# Altium PCB TMC2590_BOB40_V1_0.PcbDoc
Units mil, origin at the board's own origin, x right, y up, seen from the top; angles counter-clockwise.
Board outline 1500 x 1200 mil, 4 copper layers (Top, GND, VM, Bottom), stack 63.504 mil thick; 32 components, 34 nets, 115 pads, 154 vias.
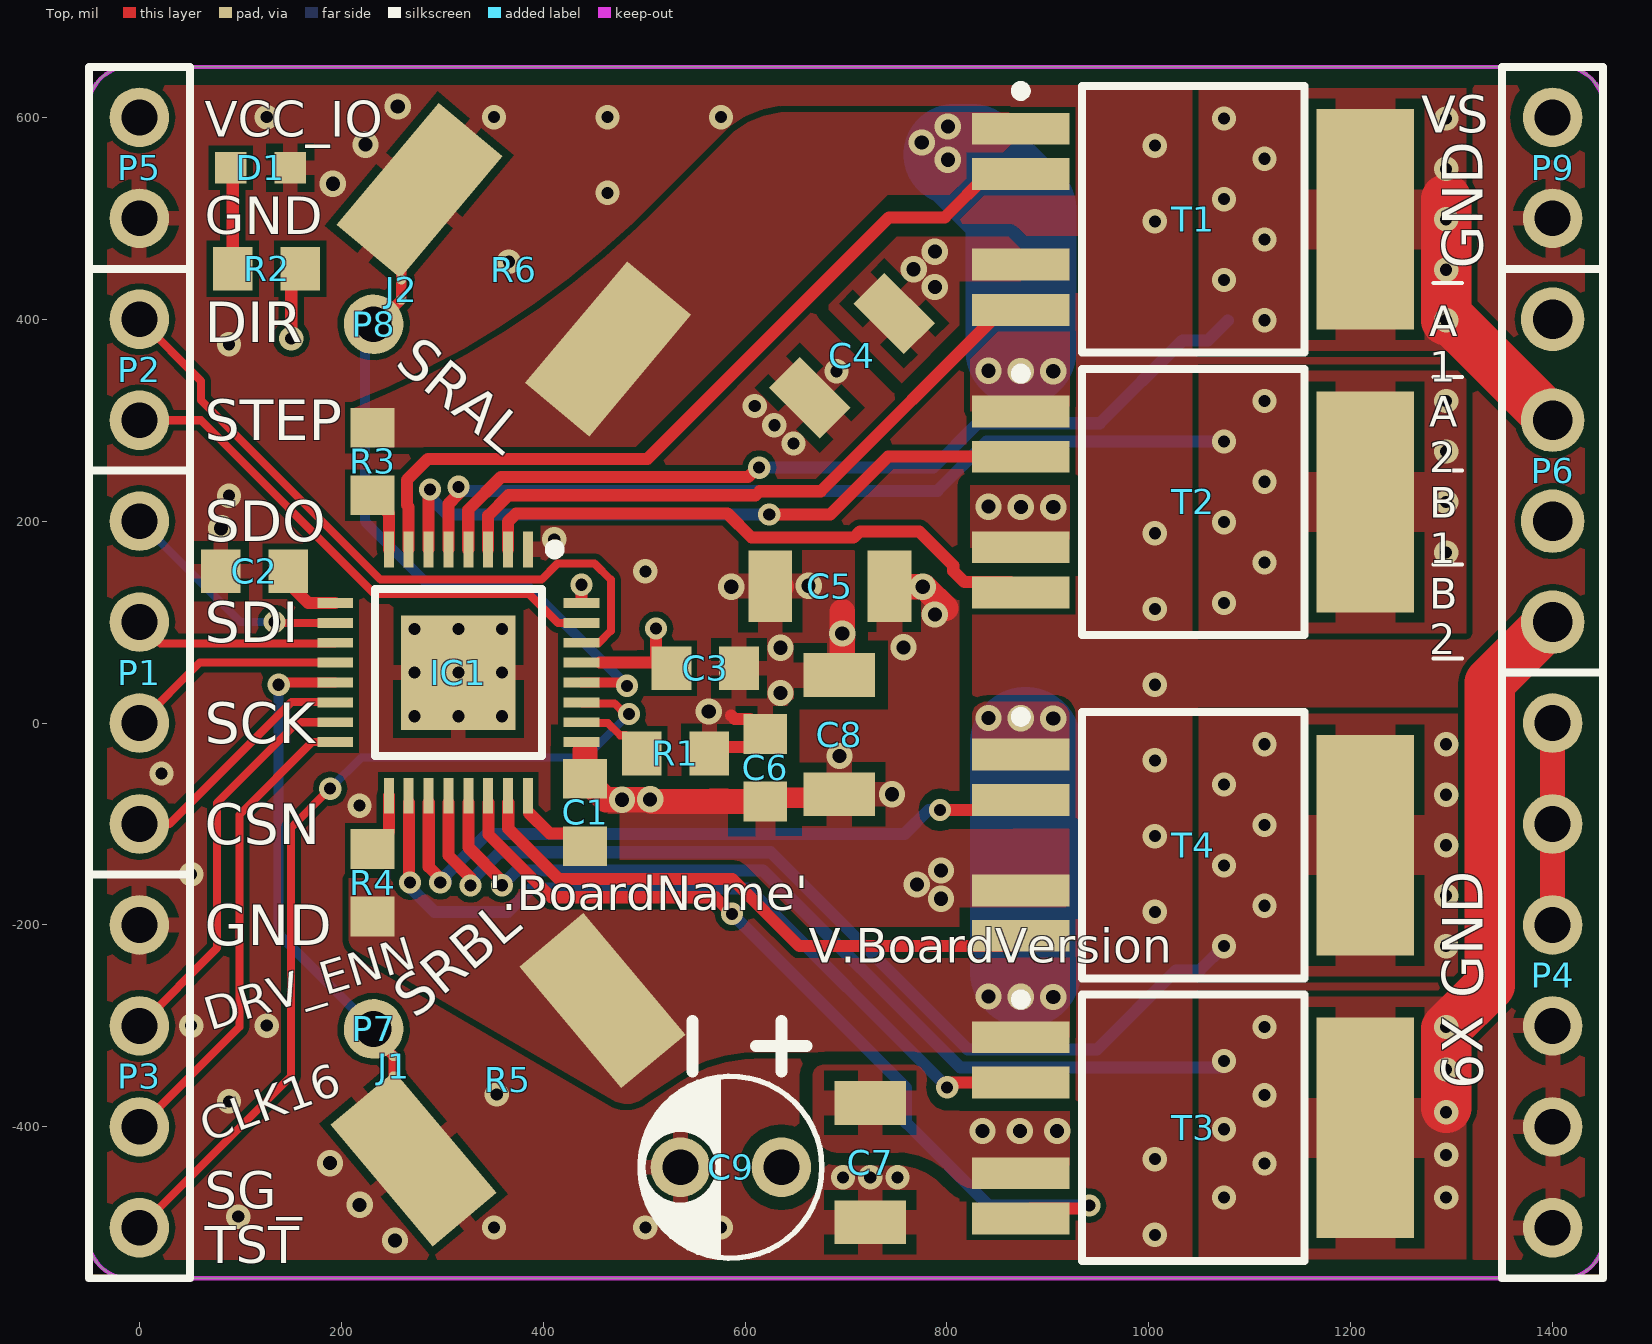
[diagram p0: Top view]
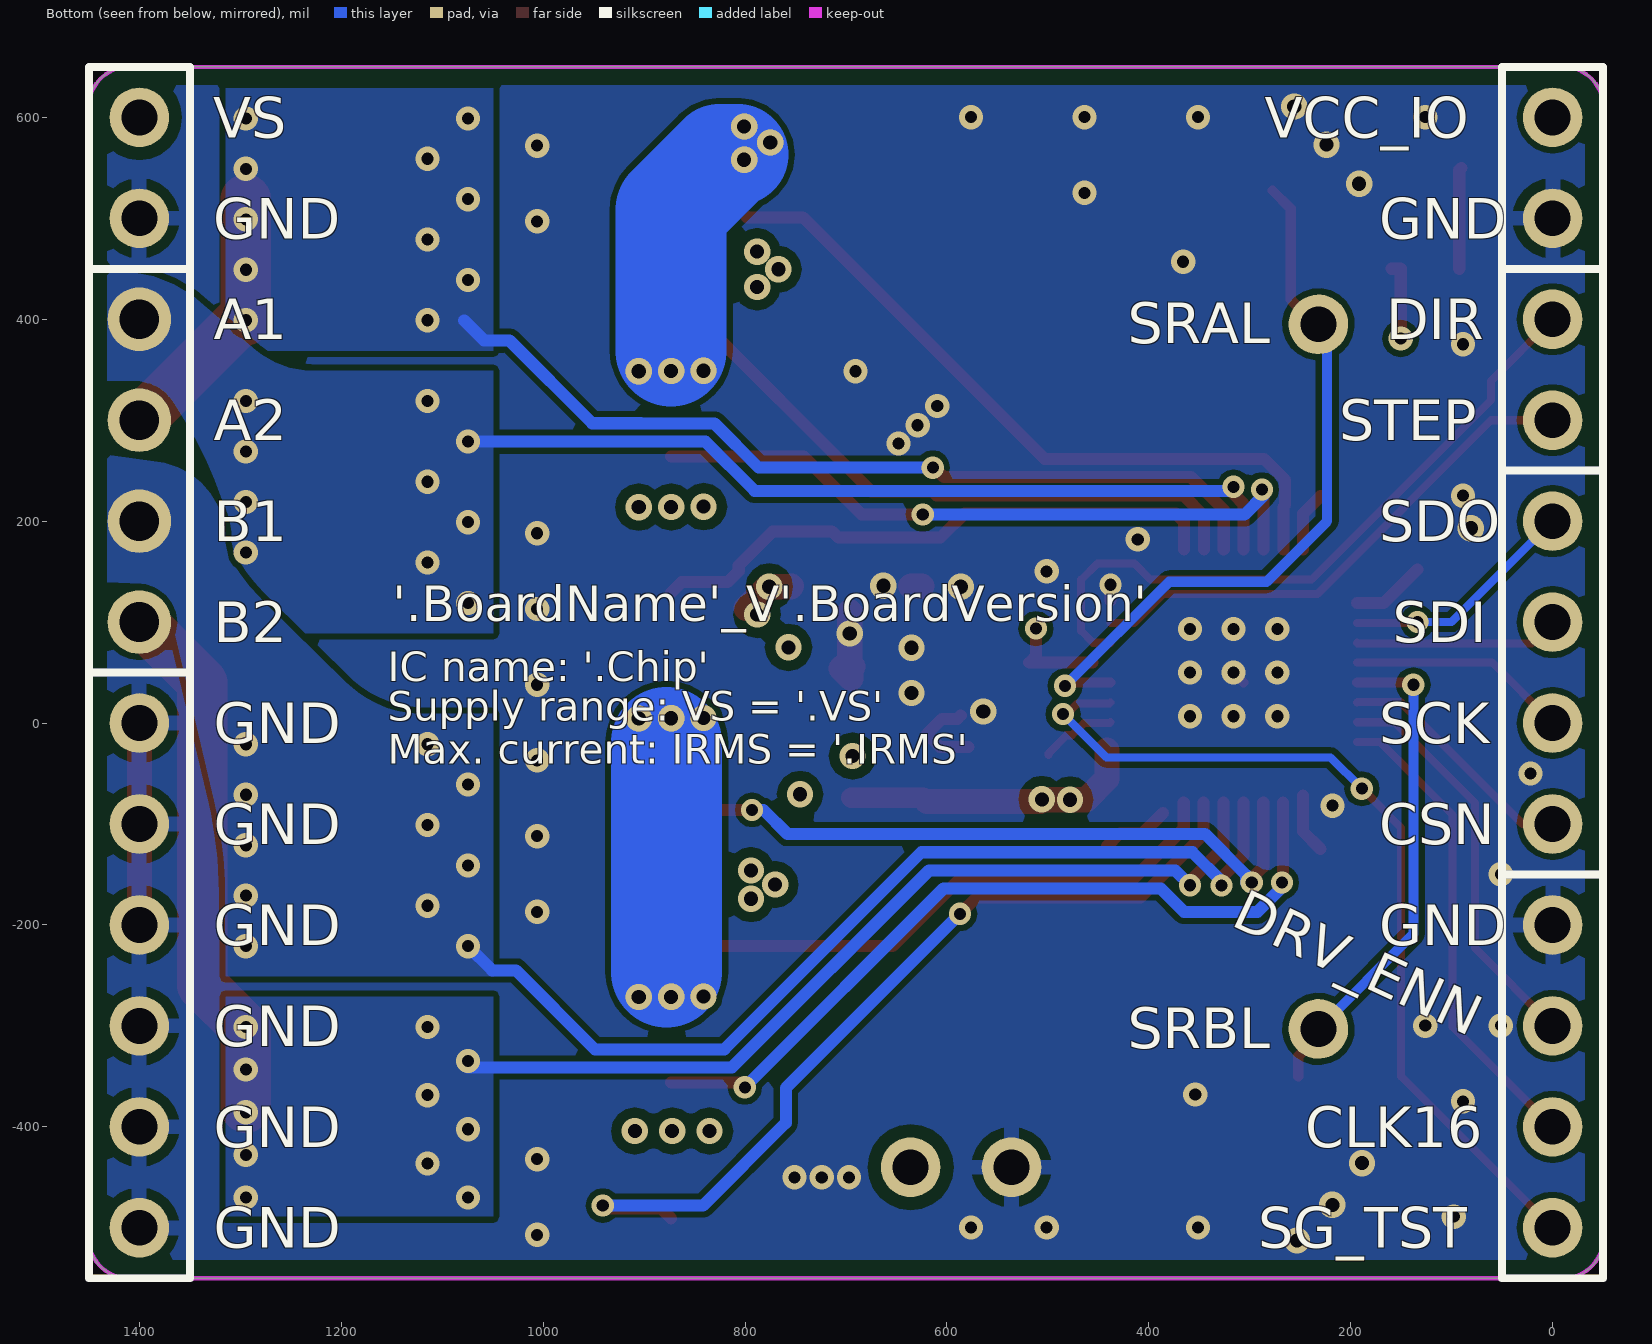
[diagram p1: Bottom view, seen from below]
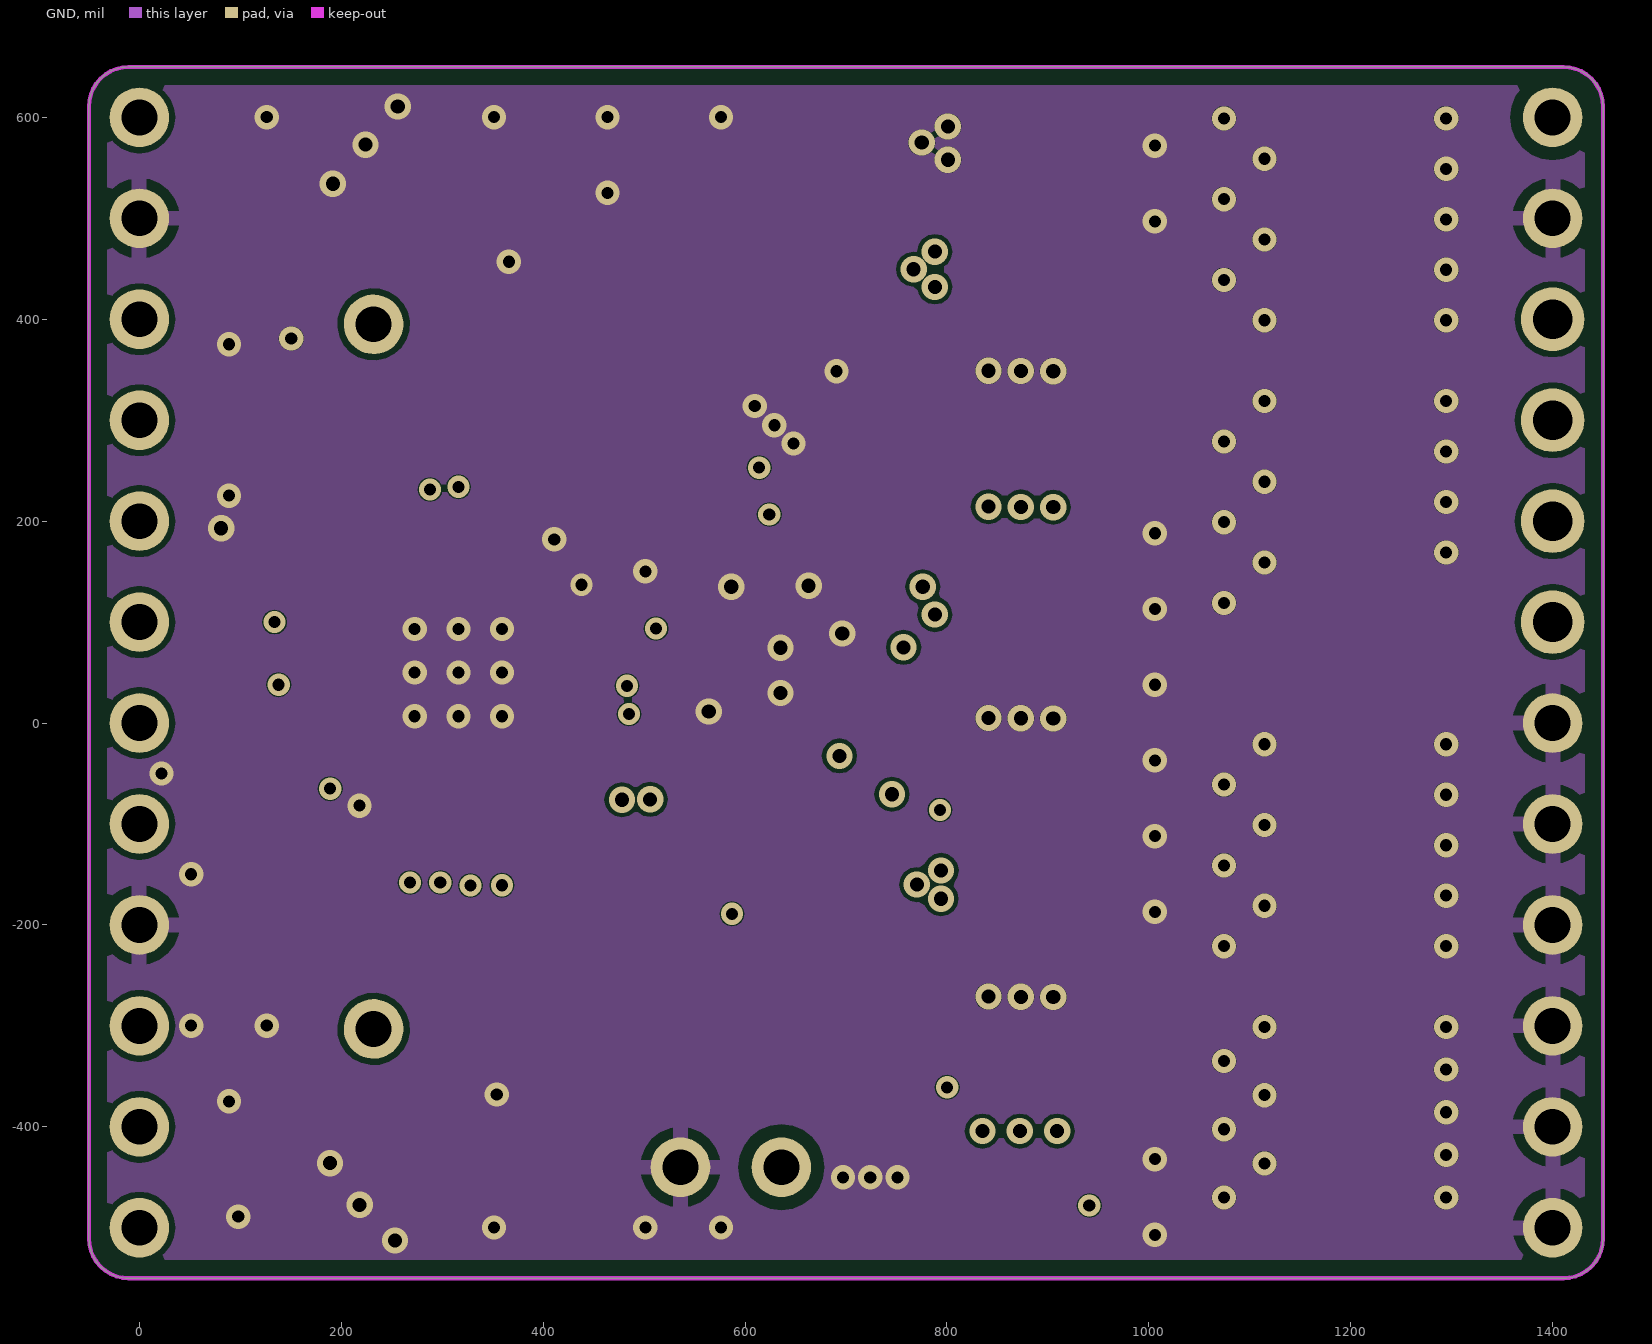
[diagram p2: GND]
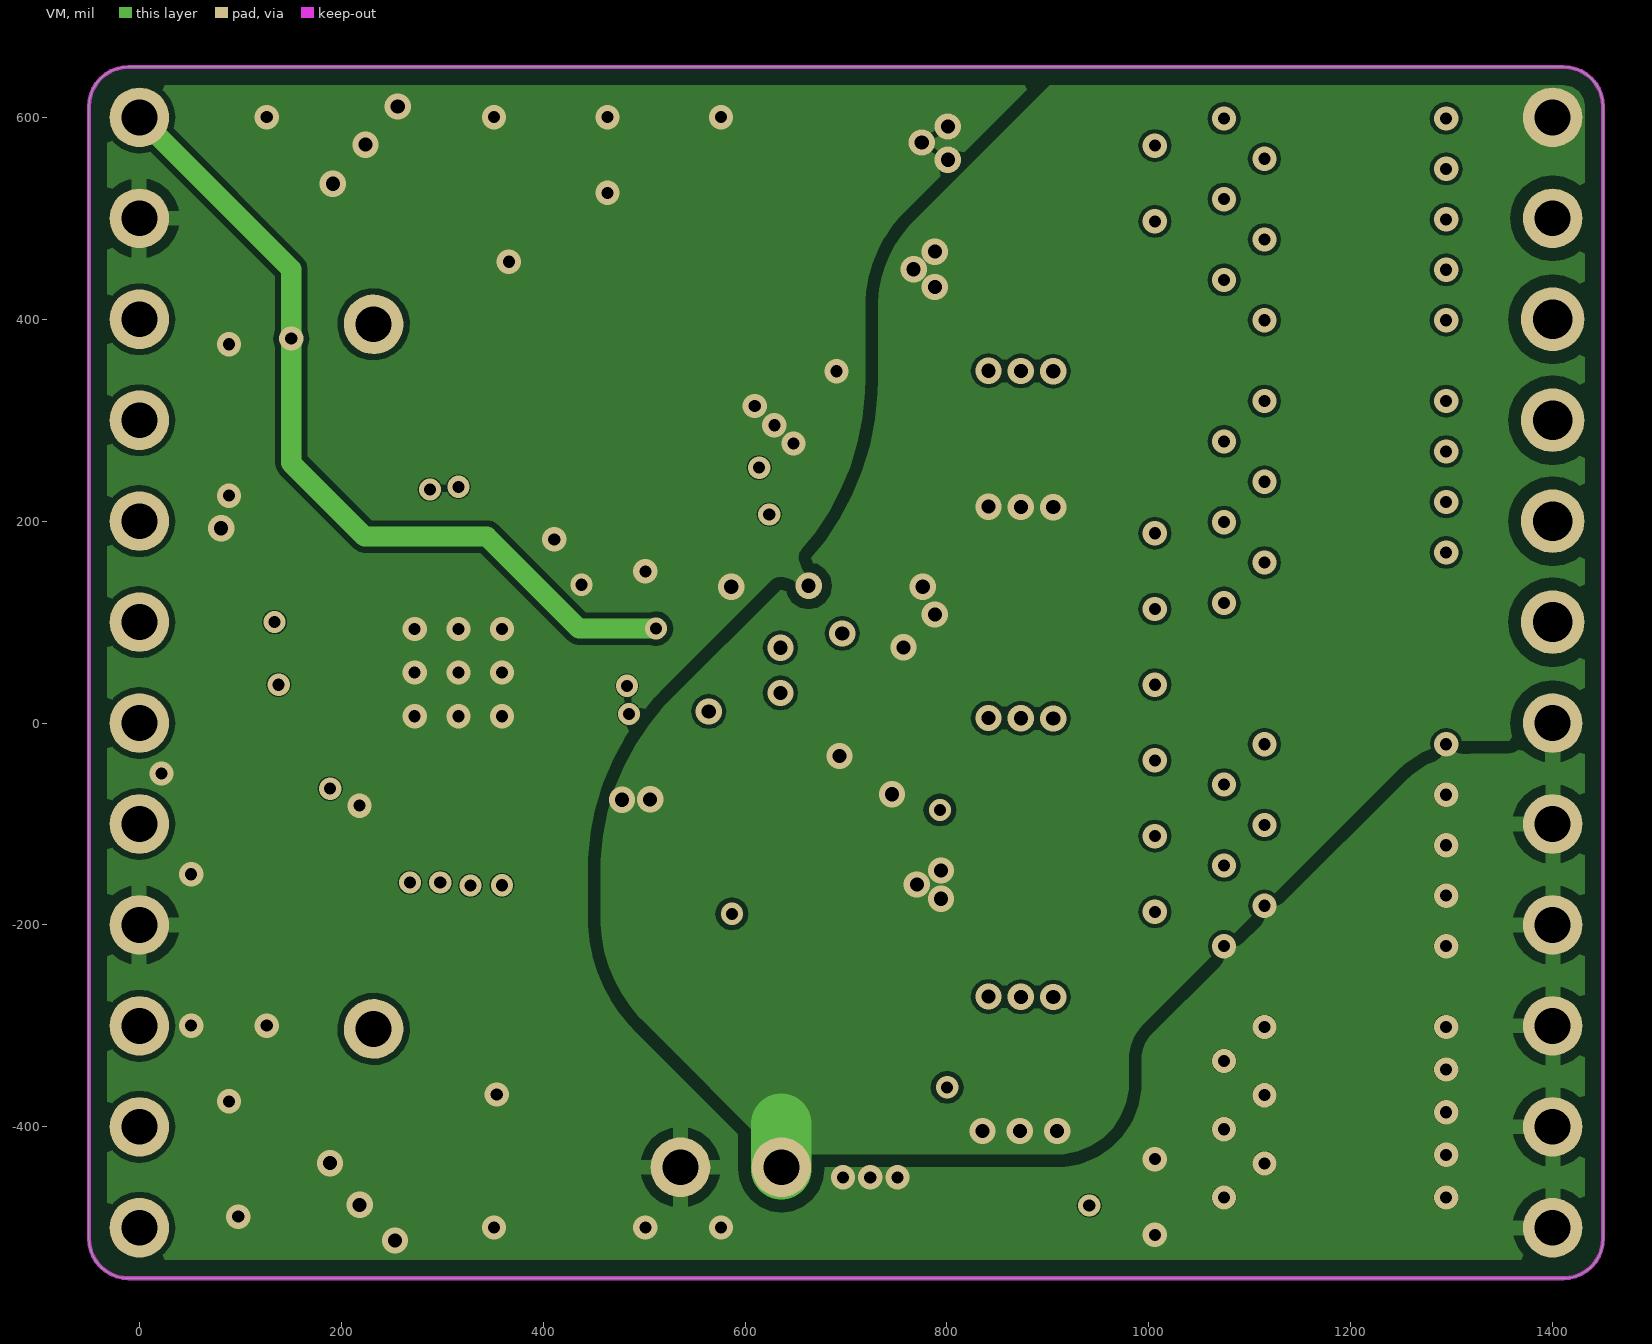
[diagram p3: VM]
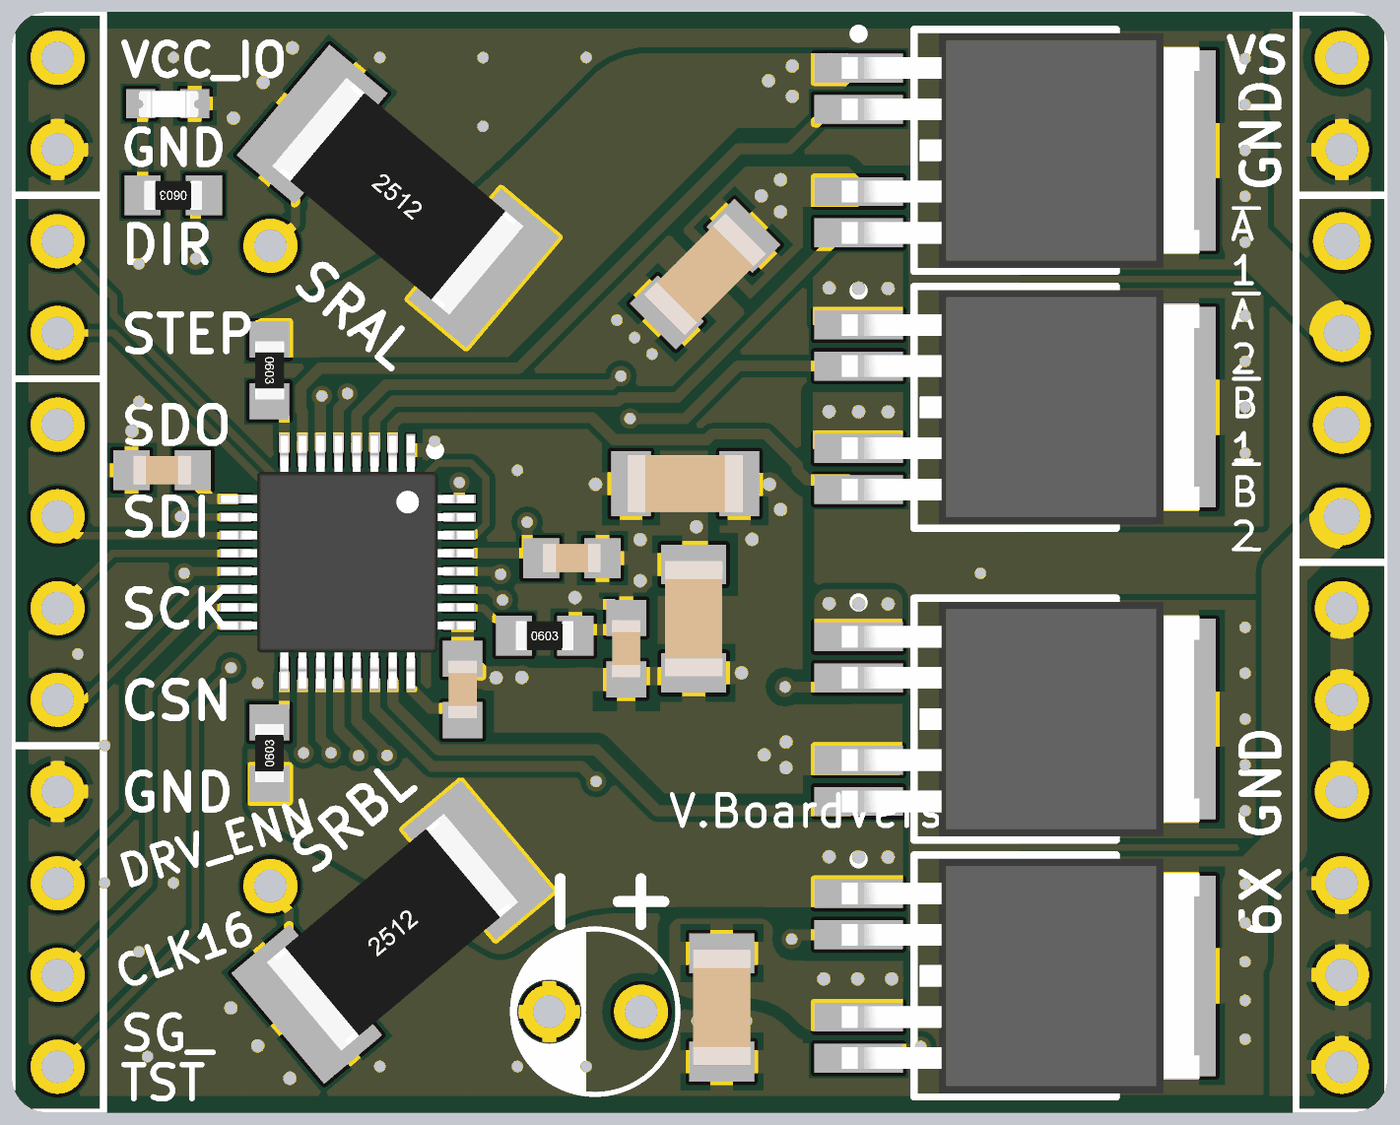
[diagram p4: 3D render of the assembled board from above, using the file's embedded part models]

## Layer stack, top to bottom
Top Solder: solder mask 0.4, Solder Resist, Dk 3.5
Top: signal copper 0.689
Dielectric 1: core 10, FR-4, Dk 4.8
GND: signal copper 1.378
Dielectric 2: prepreg 39.37, FR-4, Dk 4.2
VM: signal copper 1.378
Dielectric4: core 10, FR-4, Dk 4.2
Bottom: signal copper 0.689
Bottom Solder: solder mask 0.4, Solder Resist, Dk 3.5

## Board outline
-50,-510.63 -50,610.63 cw(c-10.63,610.63) -10.63,650 1410.63,650 cw(c1410.63,610.63) 1450,610.63 1450,-510.63 cw(c1410.63,-510.63) 1410.63,-550 -10.63,-550 cw(c-10.63,-510.63)

## Design rules (kind name [scope] priority, off if disabled: settings)
Clearance BoardOutlineClearance [OnLayer('Keep-Out Layer')] p1: gap=15.75 ignorepadtopadclearanceinfootprint=FALSE except(0: Arc-Hole Track-Hole SMDPad-Hole THPad-Hole Via-Hole Fill-Hole Poly-Hole Region-Hole Text-Hole)
Clearance VM_ST_ALONE_Clearance [InNet('+VM') vs InNet('ST_ALONE')] p2: gap=6 ignorepadtopadclearanceinfootprint=TRUE
Clearance VM_Clearance [InNet('+VM') vs not (InComponent('Q1') or InComponent('Q2') or InComponent('Q3') or InComponent('Q4'))] p3: gap=12.7 ignorepadtopadclearanceinfootprint=TRUE except(0: Arc-Hole Track-Hole SMDPad-Hole THPad-Hole Via-Hole Fill-Hole Poly-Hole Region-Hole Text-Hole; 10: Via-Fill Via-Poly Via-Region)
Clearance "Fiducial Clearance" [HasFootprint('FIDUCIAL_40MIL')] p4: gap=26 ignorepadtopadclearanceinfootprint=FALSE except(0: Arc-Hole Track-Hole SMDPad-Hole THPad-Hole Via-Hole Fill-Hole Poly-Hole Region-Hole Text-Hole)
Clearance "Mounting Hole Clearance" [(HoleDiameter >= 110) And  IsPad  And ((PadYSize_AllLayers - HoleDiameter)  <=  1)] p5: gap=30 ignorepadtopadclearanceinfootprint=FALSE except(0: Arc-Hole Track-Hole SMDPad-Hole THPad-Hole Via-Hole Fill-Hole Poly-Hole Region-Hole Text-Hole)
Clearance [All] p6: gap=6 ignorepadtopadclearanceinfootprint=FALSE except(0: Arc-Hole Track-Hole SMDPad-Hole THPad-Hole Via-Hole Fill-Hole Poly-Hole Region-Hole Text-Hole)
ComponentClearance Pinheader2PinheaderClearance [InComponentClass('Pinheader') vs InComponentClass('Pinheader')] p1: gap=0 collisioncheckmode=3 verticalgap=0 showdistances=FALSE
ComponentClearance [All] p2: gap=10 collisioncheckmode=3 verticalgap=10 showdistances=FALSE
DiffPairsRouting [All] p1 off: maxlimit=10 minlimit=7.5 mostfreqgap=10 toplayer_prefgap=7.5 toplayer_minwidth=7.5 toplayer_maxwidth=7.5 toplayer_prefwidth=7.5 midlayer1_prefgap=7.5 midlayer1_minwidth=7.5 midlayer1_maxwidth=7.5 midlayer1_prefwidth=7.5 midlayer2_mingap=10 midlayer2_minwidth=15 midlayer2_maxwidth=15 midlayer2_prefwidth=15 bottomlayer_prefgap=7.5 bottomlayer_minwidth=7.5 bottomlayer_maxwidth=7.5 bottomlayer_prefwidth=7.5 maxuncoupledlength=500
HoleSize [All] p1: absolutevalues=TRUE maxlimit=100000 minlimit=11.81 maxpercent=80.000 minpercent=20.000
HoleToHoleClearance [All] p1: gap=8 allowstackedmicrovias=TRUE
MinimumAnnularRing MinimumViaAnnualRing [OnOutside] p1: minimumring=10
MinimumSolderMaskSliver [All] p1 off: minsoldermaskwidth=1.5
PasteMaskExpansion TestPadPasteMaskExpansion [HasFootprint('SMD_TP_2X2_ROUND')] p1: expansion=-78.74
PasteMaskExpansion [All] p2: expansion=0
PlaneConnect VM_PlaneConnect [OnLayer('VM') AND InNet('+VM')] p1: planeconnectstyle=Relief reliefexpansion=20 reliefentries=4 reliefconductorwidth=20 reliefairgap=10
PlaneConnect [All] p2: planeconnectstyle=Relief reliefexpansion=20 reliefentries=4 reliefconductorwidth=10 reliefairgap=10
PolygonConnect currentSensePolygonConnect [InNetClass('CurrentSense')] p1: connectstyle=Direct reliefconductorwidth=10 reliefentries=4 polygonreliefangle="90 Angle" airgapwidth=10
PolygonConnect VSA_C1206_ConnectStyle [HasFootprint('C1206')] p2: connectstyle=Relief reliefconductorwidth=25 reliefentries=4 polygonreliefangle="90 Angle" airgapwidth=10
PolygonConnect VSA_C1_ConnectStyle [InNet('+VM') AND (inComponent('C1') or HasFootprint('SOT114P991X239-6N'))] p3: connectstyle=Direct reliefconductorwidth=20 reliefentries=4 polygonreliefangle="90 Angle" airgapwidth=8
PolygonConnect VSAConnectStyle [InNet('+VM')] p4: thpad.connectstyle=Direct thpad.reliefconductorwidth=20 thpad.reliefentries=4 thpad.polygonreliefangle="90 Angle" thpad.airgapwidth=15 smdpad.connectstyle=Relief smdpad.reliefconductorwidth=20 smdpad.reliefentries=4 smdpad.polygonreliefangle="90 Angle" smdpad.airgapwidth=15 via.connectstyle=Direct via.reliefconductorwidth=20 via.reliefentries=4 via.polygonreliefangle="90 Angle" via.airgapwidth=15
PolygonConnect MotorPhaseConnectStyle [InNetClass('MotorPower')] p5: thpad.connectstyle=Direct thpad.reliefconductorwidth=10 thpad.reliefentries=4 thpad.polygonreliefangle="90 Angle" thpad.airgapwidth=10 smdpad.connectstyle=Relief smdpad.reliefconductorwidth=60 smdpad.reliefentries=4 smdpad.polygonreliefangle="90 Angle" smdpad.airgapwidth=10 via.connectstyle=Direct via.reliefconductorwidth=10 via.reliefentries=4 via.polygonreliefangle="90 Angle" via.airgapwidth=10
PolygonConnect [All] p6: thpad.connectstyle=Relief thpad.reliefconductorwidth=15 thpad.reliefentries=4 thpad.polygonreliefangle="90 Angle" thpad.airgapwidth=10 smdpad.connectstyle=Relief smdpad.reliefconductorwidth=15 smdpad.reliefentries=4 smdpad.polygonreliefangle="90 Angle" smdpad.airgapwidth=8 via.connectstyle=Direct via.reliefconductorwidth=15 via.reliefentries=4 via.polygonreliefangle="90 Angle" via.airgapwidth=10
RoutingVias [All] p1: holewidth=12 width=22 viastyle="Through Hole" minholewidth=12 minwidth=22 maxholewidth=12 maxwidth=50
ShortCircuit [All] p1 off: allowed=FALSE
SilkToBoardRegionClearance [All] p1 off:
SilkToSilkClearance [All] p1 off: silktosilkclearance=10
SilkToSolderMaskClearance [IsPad] p1 off: minsilkscreentomaskgap=10 clearancetoexposedcopper=TRUE
SolderMaskExpansion FiducialSolderMaskExpansion [HasFootprint('FIDUCIAL_40MIL')] p1: expansion=26
SolderMaskExpansion [All] p2: expansion=4
UnRoutedNet [All] p1 off:
Width VIN_Width [InNetClass('PWR_VIN')] p1: maxlimit=300 minlimit=200 preferedwidth=210
Width Other_Width [All] p2: maxlimit=100000 minlimit=8 preferedwidth=11.81 minimp=50.000000 maximp=50.000000 favimp=50.000000
18 further rules are at their usual default settings.

## Classes and differential pairs
net class CurrentSense: LAS LBS
net class MotorPower: A1 A2 B1 B2

## Components (designator, comment, footprint, x,y, rotation, side; value= is the part's Value field where it differs from the comment)
C1 "220nF/16V/10%" C0603 441.49,-88.58 r90 top
C2 "470nF/16V/10%" C0603 114,150.4 r180 top
C3 "100nF/16V/10%" C0603 560.49,54.42 r0 top
C4 "10uF/50V/10%" C1206 705.92,364.04 r45 top
C5 "10uF/50V/10%" C1206 684.06,135.63 r0 top
C6 "100nF/50V/20%" C0603 619.88,-44.21 r270 top
C7 "10uF/50V/10%" C1206 724,-435.36 r90 top
C8 "10uF/50V/10%" C1206 693.49,-11.52 r270 top
C9 "Cap Pol1" EXT_POL_CAP 636,-440 r90 top value=TBD
D1 "LED, Blue, SMD, 20mA, 2.8V, 465 nm" LED_0603 120,550 r0 top
IC1 "TMC2590" TMC2590_QFP127P600-8N 316,50 r270 top
J1 "Net tie" "Net tie 10x20mil" 252,-340 r270 top net-tie
J2 "Net tie" "Net tie 10x20mil" 259.44,429.39 r90 top net-tie
P1 "SPI" 4_PIN_THT 0,-100 r0 top
P2 "STEP/DIR" 2_PIN_THT 0,300 r0 top
P3 "MISC" 4_PIN_THT 0,-500 r0 top
P4 "GND" 6_PIN_THT 1400,-500 r0 top
P5 "VCC_IO" 2_PIN_THT 0,500 r0 top
P6 "MAB" 4_PIN_THT_1mm_hole 1400,400 r180 top
P7 "SRBL" "TH_PIN - NO SILK" 232,-303 r40 top
P8 "SRAL" "TH_PIN - NO SILK" 232,395 r320 top
P9 "VM" 2_PIN_THT 1400,500 r0 top
R1 "0R" R0603 531.01,-30.12 r0 top
R2 "1k" R0603 126,450 r180 top
R3 "10R / 1%" R0603 231,259.15 r270 top
R4 "10R / 1%" R0603 231,-158.15 r90 top
R5 "75mR/2W/1%" R2512 365.09,-353.37 r40 top
R6 "75mR/2W/1%" R2512 370.89,449.1 r320 top
T1 "FDD8424H" SOT114P991X239-6N 1043.86,499 r0 top
T2 "FDD8424H" SOT114P991X239-6N 1043.86,219 r0 top
T3 "FDD8424H" SOT114P991X239-6N 1043.86,-401 r0 top
T4 "FDD8424H" SOT114P991X239-6N 1043.86,-121 r0 top

## Footprints (in the part's own frame and the unit in brackets; to place one, negate y for a bottom-side part, rotate by r counter-clockwise, add the part's x,y. Pads: shape width x height; smd on the part's side, far side on the other; paste and mask are expansions set on the pad)
2_PIN_THT [mm]
  round 1.5 hole 0.9: 1(0,0) 2(0,2.54)
  silkscreen extent -1.27,-1.27 1.27,3.81
4_PIN_THT [mm]
  round 1.5 hole 0.9: 1(0,0) 2(0,2.54) 3(0,5.08) 4(0,7.62)
  silkscreen extent -1.27,-1.27 1.27,8.89
4_PIN_THT_1mm_hole [mm]
  round 1.6 hole 1: 1(0,0) 2(0,2.54) 3(0,5.08) 4(0,7.62)
  silkscreen extent -1.27,-1.27 1.27,8.89
6_PIN_THT [mm]
  round 1.5 hole 0.9: 1(0,0) 2(0,2.54) 3(0,5.08) 4(0,7.62) 5(0,10.16) 6(0,12.7)
  silkscreen extent -1.27,-1.27 1.27,13.97
C0603 [mm] "0603 ceramic capacitor"
  rect 1x1.1 smd: 1(-0.85,0) 2(0.85,0)
  body extent -0.8,-0.4 0.8,0.4, height 0.8
C1206 [mm] "1206 ceramic capacitor"
  rect 1.1x1.8 smd: 1(-1.5,0) 2(1.5,0)
  body extent -1.6,-0.8 1.6,0.8, height 0.76
EXT_POL_CAP [mm]
  round 1.5 hole 0.9: 1(0,0) 2(0,2.54)
  silkscreen extent -2.29,-1.02 3.68,3.56
LED_0603 [mm]
  rect 0.8x0.8 smd: 1(-0.75,0) 2(0.75,0)
  body extent -0.8,-0.38 0.85,0.35, height 0.68
"Net tie 10x20mil" [mil]
  round 10 smd paste-39.37: 1(-10,0) 2(10,0)
  Top lines w10: 10,0 -10,0
R0603 [mm] "0603 resistor"
  rect 1x1.1 smd: 1(-0.85,0) 2(0.85,0)
  body extent -0.8,-0.4 0.8,0.4, height 0.45
R2512 [mm] "2512 resistor"
  rect 2.1x4 smd: 1(-3.1,0) 2(3.1,0)
  body extent -3.2,-1.6 3.2,1.6, height 0.59
SOT114P991X239-6N [mm] "SOT223, 6-Leads, Body 6,54x9,91mm (avg), Pitch 1,14mm, IPC Medium Density"
  rect 2.45x0.8 smd: 1(-4.335,2.28) 2(-4.335,1.14) 3(-4.335,-1.14) 4(-4.335,-2.28)
  rect 2.45x5.55 smd: 5(4.335,0)
  silkscreen extent -4.46,-3.35 2.8,3.35, body extent -4.8,-3.25 5.1,3.25, height 2.3
"TH_PIN - NO SILK" [mm]
  round 1.5 hole 0.9: 1(0,0)
TMC2590_QFP127P600-8N [mm]
  rect 0.9x0.25 smd mask+0.051: 1(-3.1,1.75) 2(-3.1,1.25) 3(-3.1,0.75) 4(-3.1,0.25) 5(-3.1,-0.25) 6(-3.1,-0.75) 7(-3.1,-1.25) 8(-3.1,-1.75) 17(3.1,-1.75) 18(3.1,-1.25) 19(3.1,-0.75) 20(3.1,-0.25) 21(3.1,0.25) 22(3.1,0.75) 23(3.1,1.25) 24(3.1,1.75)
  rect 0.25x0.9 smd mask+0.051: 9(-1.75,-3.1) 10(-1.25,-3.1) 11(-0.75,-3.1) 12(-0.25,-3.1) 13(0.25,-3.1) 14(0.75,-3.1) 15(1.25,-3.1) 16(1.75,-3.1) 25(1.75,3.1) 26(1.25,3.1) 27(0.75,3.1) 28(0.25,3.1) 29(-0.25,3.1) 30(-0.75,3.1) 31(-1.25,3.1) 32(-1.75,3.1)
  rect 2.88x2.88 smd: 33(0,0)
  silkscreen extent -3.22,-2.1 2.1,2.55, body extent -3.5,-3.5 3.5,3.5, height 1.14

## Part data
C1: library part Capacitor, "Ceramic capacitor", Capacitance=220nF, MPN=MC0603B224K160CT, VoltageRating=16V, ComponentLinknDescription=Datasheet, MF=Multicomp, Precision=10%, Type=MLCC
C2: library part Capacitor, "Ceramic capacitor", Capacitance=470nF, MPN=MC0603X474K160CT, VoltageRating=16V, ComponentLinknDescription=Datasheet, MF=Multicomp, Precision=10%, Type=MLCC
C3: library part Capacitor, "Ceramic capacitor", Capacitance=100nF, MPN=MC0603B104K160CT, VoltageRating=16V, ComponentLinknDescription=Datasheet, MF=Multicomp, Precision=10%, Type=MLCC
C4 C5 C7 C8: library part "10 µF, 50 V, ± 10%, X5R, 1206 [3216 Metric]", "SMD Multilayer Ceramic Capacitor, 1206 [3216 Metric],10 µF, 50 V, ± 10%, X5R, GRM Series", Capacitance=10uF, MPN=GRM31CR61H106KA12L, VoltageRating=50V, ComponentLinknDescription=Datasheet, MF=MURATA, Precision=10%, Type=MLCC
C6: library part Capacitor, "Ceramic capacitor", Capacitance=100nF, MPN=MC0603F104M500CT, VoltageRating=50V, ComponentLinknDescription=Datasheet, MF=Multicomp, Precision=20%, Type=MLCC
C9: "Polarized Capacitor (Radial)", Fitted="Not fitted", LatestRevisionDate=17-Jul-2002, LatestRevisionNote="Re-released for DXP Platform.", PackageDescription="Polarized Capacitor (Radial); 2 Leads", PackageReference=RB7.6-15, Published=8-Jun-2000, Publisher="Altium Limited"
D1: Colour=Blue, Current rating=20mA, MPN=LTST-C191TBKT-5A, MF=Lite-On
IC1: "Energy saving high resolution microstepping two phase stepper driver with Step/Dir, SPI, up to 60V, TQFP32(5x5)", MF=TRINAMIC, MPN=TMC2590
J1 J2: library part NET_TIE
P1 P3: library part "Header 4", "Header, 4-Pin", ComponentClass=Pinheader, Fitted="Not fitted", LatestRevisionDate=17-Jul-2002, LatestRevisionNote="Re-released for DXP Platform.", Publisher="Altium Limited"
P2 P5 P9: library part "Header 2", "Header, 2-Pin", ComponentClass=Pinheader, Fitted="Not fitted", LatestRevisionDate=17-Jul-2002, LatestRevisionNote="Re-released for DXP Platform.", Publisher="Altium Limited"
P4: library part "Header 6", "Header, 6-Pin", Fitted="Not fitted", LatestRevisionDate=17-Jul-2002, LatestRevisionNote="Re-released for DXP Platform.", Publisher="Altium Limited"
P6: library part "Wire-To-Board Connector, 2.5 mm, 4 Contacts, Header, EH Series, Through Hole, 1 Rows", "Wire-To-Board Connector, 2.5 mm, 4 Contacts, Header, EH Series, Through Hole, 1 Rows", MPN=B4B-EH-A, Fitted="Not fitted", MF="JST (JAPAN SOLDERLESS TERMINALS)"
P7 P8: library part PIN, ComponentClass=Pinheader, Fitted="Not fitted", Note=n.b
R1: library part "R, 0 ohm, 0603 [1608 Metric], 100 mW, MCWR Series", "SMD Chip Resistor, Thick Film, 0 ohm, 0603 [1608 Metric], 100 mW, MCWR Series", MPN="MCWR06X000 PTL", PowerRating=100mW, Temp coefficient=*ppm, MF=MULTICOMP, Resistance=0R
R2: library part "1 kohm, 50 V, 0603 [1608 Metric], 63 mW, ± 1%, MC Series", "1 kohm, 50 V, 0603 [1608 Metric], 63 mW, ± 1%, MC Series", MPN=MC0063W060311K, PowerRating=63mW, Temp coefficient=*ppm, VoltageRating=50V, MF=MULTICOMP, Precision=1%, Resistance=1k
R3 R4: library part ".05 OHM 2W 1% Current Sense Resistor", "SMD Chip Resistor, Thick Film, 10 ohm, 50 V, 0603 [1608 Metric], 100 mW, ± 1%, MCWR Series", MPN=MCWR06X10R0FTL, PowerRating=100mW, Resistance=10R, ComponentLinknDescription=Datasheet, MF=Multicomp, Precision=1%
R5 R6: library part ".075 OHM 2W 1% Current Sense Resistor", "SMD Current Sense Resistor, 0.075 ohm, 2 W, 2512 [6432 Metric], ± 1%, TLR Series", MPN=TLR3A20WR075FTDG, PowerRating=2W, Resistance=75mR, ComponentLinknDescription=Datasheet, MF="TE CONNECTIVITY", Precision=1%
T1 T2 T3 T4: "Dual MOSFET, N and P Channel, 9 A, 40 V, 0.019 ohm, 10 V, 1.7 V", MF="FAIRCHILD SEMICONDUCTOR", MPN=FDD8424H

## Via types
v1: diameter 24, hole 12, Top to Bottom, tented both sides, 54 vias
v2: diameter 26, hole 14, Top to Bottom, tented both sides, 44 vias
v3: diameter 24.1, hole 12, Top to Bottom, tented both sides, 28 vias
v4: diameter 22, hole 12, Top to Bottom, tented both sides, 19 vias
v5: diameter 24, hole 12, Top to Bottom, 9 vias

## Nets (pads, with @x,y where several pads share a name; then routed paths per layer and width w, separated by ;. In a path a pad name is that pad's centre, name@x,y a point inside that pad or via, vN(x,y) a via of type N, cw(c..) or ccw(c..) an arc to the next point about the centre after c; other vN are vias at no path point)
+VM: C1.2 C4.2 C5.2 C6.2 C7.2 C8.2 C9.1 IC1.25 P9.2 T1.3 T2.3 T3.3 T4.3 | length 392
  Top w20: C6.2 623.5,-74.06 C8.2@695,-74.06
  Top w25: 441.49,-27 C1.2 462.37,-76 v2(478,-76) v2@505.58,-76 ; v2(506,-75.58) v2@505.58,-76 ; C6.2 507.26,-77.68 v2@505.58,-76 ; C5.2@754.05,135.63 754.68,135 v2(776,135) 777.76,135 v2@798.94,113.82
  VM w60: C9.1@636,-442 636,-397
  other v2: 835.19,-404.24 872.19,-404.24 909.19,-404.24 794,-174 770.18,-160 794.18,-146 745.49,-70.58 693.49,-32.58 757,75 788,107.49 841.06,214.35 873.19,214.12 905.33,213.88 788,432 767,449.5 788,467
A1: IC1.5 P6.1 T2.5 | length 850.2
  Top w12: IC1.5 306.16,216.98 316,226.83 v4(316,234)
  Bottom w12: v4(316,234) 320,230 790.51,230 839.28,278.76 1077.95,278.76 v1@1078.19,279
  other v1: 1074.53,119 1114.53,159 1294.53,169 1074.53,199 1294.53,219 1114.53,239 1294.53,269 1074.53,279 1114.53,319 1294.53,319
A2: IC1.4 P6.2 T1.5 | length 1140.6
  Top w12: IC1.4 325.84,211.21 358.3,243.67 603.05,243.67 614,254.62 v4(614,253)
  Top w50: v1(1294.53,399) v1@1294.53,404.68 ; 1294.53,519 v1(1294.53,499) v1(1294.53,449) v1@1294.53,404.68 ; P6.2@1400,299.21 v1@1294.53,404.68
  Bottom w12: v4(614,253) 786.41,253 830.17,296.76 903.01,296.76 903.25,297 951.36,297 1033.36,379 1058.43,379 1078.19,398.76
  other v1: 1114.53,399 1074.53,439 1114.53,479 1074.53,519 1294.53,549 1114.53,559 1074.53,599 1294.53,599
B1: IC1.20 P6.3 T4.5 | length 976.5
  Top w12: IC1.20@306.37,-79 306.37,-131.38 328.1,-153.1 v4(328.1,-160.89)
  Bottom w12: v4(328.1,-160.89) 328.1,-156.83 356.93,-128 625.32,-128 820.55,-323.24 948.76,-323.24 1027,-245 1050.53,-245 v1(1074.53,-221)
  other v1: 1294.53,-221 1114.53,-181 1294.53,-171 1074.53,-141 1294.53,-121 1114.53,-101 1294.53,-71 1074.53,-61 1114.53,-21 1294.53,-21
B2: IC1.21 P6.4 T3.5 | length 1424.8
  Top w12: IC1.21@326.06,-79 326.06,-123.35 359.09,-156.37 v4(359.09,-160.63)
  Top w50: v1@1294.53,-381 1294.53,-302.83 1337.53,-259.83 1337.53,39.89 P6.4@1400,102.36
  Bottom w12: v4(359.09,-160.63) 373.72,-146 617.86,-146 813.1,-341.24 1074.29,-341.24 v1@1074.53,-341
  other v1: 1074.53,-470 1294.53,-470 1114.53,-436.2 1294.53,-427.75 1074.53,-402.4 1294.53,-385.5 1114.53,-368.6 1294.53,-343.25 1074.53,-334.8 1114.53,-301 1294.53,-301
CLK16: IC1.16 P3.2 | length 474.8
  Top w8: P3.2 99,-301 99,-91 171.1,-18.9 IC1.16
CSN: IC1.14 P1.1 | length 244.3
  Top w8: P1.1 29.7,-100 150.7,21 193.43,21 IC1.14
DIR: IC1.30 P2.2 | length 682.8
  Top w8: P2.2 61,339 61,319.8 238.8,142 398.3,142 414.3,158 451,158 467,142 467,91.39 455.14,79.53 IC1.30
DRV_ENN: IC1.15 P3.3 | length 402.9
  Top w8: P3.3 77,-223 77,-79 156.79,0.79 IC1.15
GND: C2.2 C3.2 C4.1 C5.1 C6.1 C7.1 C8.1 C9.2 D1.2 IC1.1 IC1.32 IC1.33 J1.2 J2.2 P3.4 P4.1 P4.2 P4.3 P4.4 P4.5 P4.6 P5.1 P9.1 R1.2 R5.1 R6.1 | length 503.7
  Top w10: J2.2 259.44,509.59 R6.1 ; IC1.33@306.16,40.16 v5(316,50)
  Top w12: IC1.32@438,121 v4(438,137) ; R1.2@578.49,-23.58 607.05,-23.58 C6.1 605,4.13 589.83,4.13 586.36,7.6
  Top w25: C5.1 C5.1@635.94,135.63 ; C8.1@693,56.05 696.26,59.31 v2(696.26,88.74) 696.26,110.38 ; C8.1@695,50.79 695,44.06 705,54.05 C8.1@703,56.05 ; P4.4 P4.5 P4.6
  other v1: 697,-450 724,-450 751,-450 218,-81.85 22,-50 411,182 648,277 629,295 609.65,314 690.57,348.53
  other v2: 253.14,-512.59 218.19,-477.27 188.86,-435.98 564,11.56 635,29.89 635,74.65 586.36,135 663,136 81,193 191.64,534.25 224,573 255.92,610.85
  other v3: 1006,-507 351.23,-499.73 501.23,-499.73 576.23,-499.73 98,-489 1006,-432 88.73,-374.73 354,-368 51.23,-299.73 126.23,-299.73 1006,-187 51.23,-149.73 1006,-112 1006,-37 1006,38 1006,113 501.23,150.27 1006,188 88.73,225.27 88.73,375.27 366,457 1006,497 463.73,525.27 1006,572 126.23,600.27 351.23,600.27 463.73,600.27 576.23,600.27
  other v5: 272.69,6.69 316,6.69 359.31,6.69 272.69,50 359.31,50 272.69,93.31 316,93.31 359.31,93.31
HA1: IC1.2 T2.4 | length 579.6
  Top w12: IC1.2 365.21,199.67 373.21,207.67 582.54,207.67 606.57,183.64 707.59,183.64 713.71,189.76 772.51,189.76 806.26,156.01 806.26,150.62 817.22,139.67 862.76,139.67 T2.4
HA2: IC1.3 T1.4 | length 645.5
  Top w12: IC1.3 345.53,205.44 365.75,225.67 610.5,225.67 614.47,229.64 675,229.64 854.6,409.24 T1.4
HB1: IC1.23 T4.4 | length 585.5
  Top w12: IC1.23@365.43,-79 365.43,-104.47 415.54,-154.58 587.37,-154.58 653.79,-221 863.43,-221 T4.4@873.19,-211.24
HB2: IC1.22 T3.4 | length 872.1
  Top w12: IC1.22@345.75,-79 345.75,-110.24 408.08,-172.58 570.58,-172.58 v4(587,-189) ; T3.4 882.94,-481.02 935.28,-481.02 938.29,-478 v4(941,-478)
  Bottom w12: v4(587,-189) 759.59,-361.59 759.59,-396.07 841.53,-478 v4(941,-478)
LA1: IC1.6 T2.2 | length 685.3
  Top w12: IC1.6 286.47,229.83 v4(288,231.35) ; v4(624,206.64) 684.38,206.64 741.63,263.88 T2.2
  Bottom w12: v4(288,231.35) 288,228.01 285.85,225.86 305.07,206.64 v4(624,206.64)
LA2: IC1.7 T1.2 | length 803.3
  Top w12: IC1.7 266.79,214.13 265,215.92 265,240.88 285.79,261.67 503.18,261.67 742.51,501 797.83,501 840.71,543.88 T1.2
LAS: R3.1 R6.2 T1.1 T2.1 | length 225.8
  Bottom w100: v2@806.88,563.14 825.5,563.14
  Bottom w110: 825.5,556.14 873.19,508.45 873.19,368.76
  other v2: 873.19,348.76 905.33,348.53 841.06,349 800.92,558 775,575 800.92,591
LB1: IC1.19 T4.2 | length 696.8
  Top w12: IC1.19@286.69,-79 286.69,-142.49 298.1,-153.89 v4(298.1,-157.89) ; v4(793,-86) 863.31,-86 T4.2
  Bottom w12: v4(298.1,-157.89) 303.5,-157.89 303.5,-150.7 344.2,-110 758,-110 782,-86 v4(793,-86)
LB2: IC1.18 T3.2 | length 794.7
  Top w12: IC1.18@267,-79 267,-159.17 v4(268.17,-158) ; v4(800.2,-360.87) 804.96,-356.12 T3.2
  Bottom w12: v4(268.17,-158) 268.17,-162.76 292.42,-187 365.25,-187 388.25,-164 603.34,-164 v4(800.2,-360.87)
LBS: R4.1 R5.2 T3.1 T4.1 | length 227.5
  Bottom w110: 877.61,-246.82 877.61,-19.36
  other v2: 873.19,-271.24 905.33,-271.47 841.06,-271 873.19,4.76 905.33,4.53 841.06,5
NetC1_1: C1.1 IC1.24 | length 69.2
  Top w12: IC1.24@385.99,-89.08 406.18,-109.27 428.72,-109.27 C1.1
NetC2_1: C2.1 IC1.9 | length 73.7
  Top w12: C2.1@134.02,152.14 167.26,118.9 IC1.9
NetD1_1: D1.1 R2.2 | length 100.9
  Top w12: D1.1 92.54,547.94 R2.2
SCK: IC1.12 P1.2 | length 218.7
  Top w8: P1.2 59.84,59.84 IC1.12
SDI: IC1.11 P1.3 | length 202.9
  Top w8: P1.3 21,79 193.43,79 IC1.11
SDO: IC1.10 P1.4 | length 235.7
  Top w8: v4(134,100) 134.79,99.21 IC1.10
  Bottom w8: P1.4 100,100 v4(134,100)
SG_TST: IC1.27 P3.1 | length 891.6
  Top w8: P3.1 150,-350 150,-104 v4(189,-65) ; IC1.27 438.97,19.55 470.55,19.55 481.21,8.89 v4(485,8.89)
  Bottom w8: v4(189,-65) 220,-34 442.11,-34 v4(485,8.89)
SRA: IC1.8 R3.2 | length 59.7
  Top w12: R3.2@230,224.69 247.1,207.58 IC1.8
SRAL: IC1.28 J2.1 P8.1 | length 578
  Top w10: P8.1 235.05,395 J2.1 ; IC1.28 479.73,40.16 v4(483,36.89)
  Bottom w10: P8.1@223.32,366.92 223.32,200 283.32,140 379.89,140 v4(483,36.89)
SRB: IC1.17 R4.2 | length 59.7
  Top w12: R4.2@230,-124.69 247.1,-107.58 IC1.17
SRBL: IC1.13 J1.1 P7.1 | length 472.1
  Top w10: v4(138,38) 140.16,40.16 IC1.13 ; P7.1 232,-310 J1.1
  Bottom w10: v4(138,38) 138,-209 P7.1
ST_ALONE: IC1.26 R1.1 | length 75.7
  Top w8: IC1.26 438.97,-0.13 464.32,-0.13 476.3,-12.11 481.51,-12.11 499.49,-30.09 R1.1@499.49,-31.58
STEP: IC1.31 P2.1 | length 521.2
  Top w8: P2.1 61,300 233,128 386,128 414.79,99.21 IC1.31
VCC_IO: C3.1 IC1.29 P5.2 R2.1 | length 1011.5
  Top w12: v1(150.49,380.94) 150.49,450 R2.1 ; IC1.29@455.67,59.84 455.71,59.89 492.53,59.89 492.57,59.84 518.49,59.84 511.88,66.45 v4(511.88,93.63)
  VM w20: P5.2 150.49,449.51 v1(150.49,380.94) 150.49,257.51 223.35,184.65 344.35,184.65 435.37,93.63 v4(511.88,93.63)

## Polygon pours and split planes (outlines as drawn)
GND on Top "GND_L01_P103" (solid, pour order 103): -50,-510.63 -50,610.63 cw(c-10.63,610.63) -10.63,650 1410.63,650 cw(c1410.63,610.63) 1450,610.63 1450,-510.63 cw(c1410.63,-510.63) 1410.63,-550 -10.63,-550 cw(c-10.63,-510.63)
LBS on Top "LBS_L01_P102" (solid, pour order 102): 906.42,-326.24 921.42,-311.24 921.42,-226.24 876.42,-181.24 579.24,-181.24 551.98,-153.98 207.38,-153.98 207.38,-213.44 ccw(c220.89,-213.44) 214.09,-225.12 468.62,-373.27 ccw(c482.72,-349.05) 498.18,-372.42 533.96,-348.75 cw(c608.76,-461.79) 608.76,-326.24
+VM on Top "+VM_L01_P101" (solid, pour order 101): 812,137.2 766.63,137.2 653.19,23.76 633.26,3.83 563,-66.43 463.85,-66.43 463.85,-165.58 608.58,-165.58 664.24,-221.24 921,-221.24 921,-95.46 812,-95.46
LAS on Top "LAS_L01_P100" (solid, pour order 100): 865,605 643.97,605 ccw(c643.97,518.16) 582.56,579.56 508.34,505.34 cw(c-98.97,1112.65) 229.69,319.15 210,311 210,306 243,273 490.83,273 741.16,523.33 813.53,523.33 865,574.79
LAS on Top "LAS_L01_P095" (solid, pour order 95): 873.19,308.76 823.19,308.76 823.19,384.92 837.03,398.76 916.42,398.76 921.42,393.76 921.42,313.76
+VM on Top "+VM_L01_P094" (solid, pour order 94): 861.29,481.71 719.07,481.71 664.68,427.32 765.71,326.29 873.19,433.76 873.19,469.81
LBS on Top "LBS_L01_P091" (solid, pour order 91): 873.55,-30.88 873.19,-31.24 825,-31.24 825,7 cw(c839,7) 839,21 908,21 cw(c908,8) 921,8 921,-23.78 913.55,-31.24
no net on Top "NONET_L01_P113" (solid, pour order 113): 512,-75.58
+VM on Top "+VM_L01_P093" (solid, pour order 93): 873.19,174.12 872.84,173.76 823.19,173.76 823.19,258.76 828.19,263.76 921.42,263.76 921.42,181.99 913.19,173.76
+VM on Top "+VM_L01_P092" (solid, pour order 92): 898.06,-461.36 827.66,-461.36 cw(c827.66,-435.63) 809.46,-453.82 802.02,-446.38 ccw(c751.68,-496.71) 751.68,-425.53 693.16,-425.53 cw(c693.16,-399.2) 666.83,-399.2 666.84,-350.16 cw(c678.64,-350.16) 678.64,-338.36 764.96,-338.36 cw(c764.96,-353.4) 780,-353.4 780,-364 ccw(c800,-364) 800,-384 921.42,-384 921.42,-438.01
B2 on Top "B2_L01_P097" (solid, pour order 97): 1049.53,-271 1049.53,-531 1314.53,-531 1314.53,-271
B1 on Top "B1_L01_P099" (solid, pour order 99): 1049.53,9 1049.53,-251 1314.53,-251 1314.53,9
A1 on Top "A1_L01_P098" (solid, pour order 98): 1049.53,349 1049.53,89 1314.53,89 1314.53,349
A2 on Top "A2_L01_P096" (solid, pour order 96): 1049.53,629 1049.53,369 1314.53,369 1314.53,629
GND on Bottom "GND_L04_P112" (solid, pour order 112): -50,-510.63 -50,610.63 cw(c-10.63,610.63) -10.63,650 1410.63,650 cw(c1410.63,610.63) 1450,610.63 1450,-510.63 cw(c1410.63,-510.63) 1410.63,-550 -10.63,-550 cw(c-10.63,-510.63)
B2 on Bottom "B2_L04_P108" (solid, pour order 108): 1049.53,-271 1049.53,-488.8 1314.53,-488.8 1314.53,-271
A2 on Bottom "A2_L04_P109" (solid, pour order 109): 1049.53,629 1049.53,369 1314.53,369 1314.53,629
A1 on Bottom "A1_L04_P110" (solid, pour order 110): 1049.53,349 1049.53,89 1314.53,89 1314.53,349
A1 on Bottom "A1_L04_P107" (solid, pour order 107): 1450,447 1421.3,447 ccw(c1421.27,296.31) 1416.98,446.94 ccw(c1420.49,322.93) 1339.47,416.87 1284.53,369.49 cw(c1229.41,433.39) 1229.41,349 1213,349 1213,209 1313.65,209 cw(c1703.9,87.55) 1350,292 1365.85,317.29 cw(c1405.06,292.72) 1405.05,338.99 1450,339
B1 on Bottom "B1_L04_P111" (solid, pour order 111): 1049.53,9 1049.53,-251 1314.53,-251 1314.53,9
B1 on Bottom "B1_L04_P106" (solid, pour order 106): 1314.85,181.3 cw(c1277.24,181.29) 1309.61,162.14 cw(c1134.41,265.81) 1277.18,120.7 1196.19,41 cw(c1118.04,120.43) 1118.04,9 1108,9 1108,-210 1315,-210 1315,-167.76 cw(c1708.62,-167.77) 1325.62,-76.96 1371.54,116.73 cw(c1398.64,110.3) 1397.5,138.13 1450,140.28 1450,268.43 1382.53,258.93 ccw(c1393.49,181.06)
GND on VM "GND_L03_P117" (solid, pour order 117): -50,-510.63 -50,610.63 cw(c-10.63,610.63) -10.63,650 1410.63,650 cw(c1410.63,610.63) 1450,610.63 1450,-510.63 cw(c1410.63,-510.63) 1410.63,-550 -10.63,-550 cw(c-10.63,-510.63)
+VM on VM "+VM_L03_P105" (solid, pour order 105): 457,-192.29 457,-147.26 cw(c701.46,-147.26) 528.6,25.6 653.45,150.45 ccw(c463.83,340.07) 732,340.08 732,412.3 cw(c851.97,412.3) 767.14,497.14 920,650 1410.63,650 cw(c1410.64,610.64) 1450,610.63 1450,-17.36 1318.43,-17.36 ccw(c1318.42,-120.61) 1245.4,-47.6 994.07,-298.93 ccw(c1028.03,-332.89) 980,-332.89 980,-355.75 cw(c908.74,-355.74) 908.74,-427 631,-427 499.92,-295.91 cw(c603.53,-192.3)
GND on GND "GND_L02_P104" (solid, pour order 104): -50,-510.63 -50,610.63 cw(c-10.63,610.63) -10.63,650 1410.63,650 cw(c1410.63,610.63) 1450,610.63 1450,-510.63 cw(c1410.63,-510.63) 1410.63,-550 -10.63,-550 cw(c-10.63,-510.63)

## Keep-outs
Keep-Out Layer:
  the board outline again, w4

## Silkscreen, mask and mechanical layers (free items; w line width, h text height)
Top Overlay:
  lines w4: 1282,64 1310,64 ; 1282,157 1310,157 ; 1282,250 1310,250 ; 1282,343 1310,343 ; 1282,436 1310,436
  text "VS" at 1269.99,585 h37
  text "VCC_IO" at 65,581 h35
  text "GND" at 65,484 h37.4
  text "GND" at 1331,450 h40 r90
  text "DIR" at 65,377.01 h40
  text "SRAL" at 252,355 h40 r320
  text "STEP" at 65,280 h40
  text "SDO" at 65,180.01 h40
  text "SDI" at 65,80.01 h40
  text "A / 1 / A / 2 / B / 1 / B / 2" at 1278,68.33 h30
  text "SCK" at 65,-19.99 h40
  text "CSN" at 65,-119.99 h40
  text "'.BoardName'" at 346,-185.36 h34
  text "GND" at 65,-220 h40
  text "V.BoardVersion" at 663.23,-237.36 h34
  text "SRBL" at 273,-294 h40 r40
  text "DRV_ENN" at 70,-305 h33 r17
  text "6X GND" at 1331,-363 h40 r90
  text "CLK16" at 67,-416 h33 r20
  text "SG_" at 65,-481.01 h37
  text "TST" at 65,-535 h37
Bottom Overlay:
  lines w8: 1350,50 1350,450
  text "VCC_IO" at 284.93,580 h40
  text "VS" at 1326.63,580 h40
  text "GND" at 171.63,480 h40
  text "GND" at 1326.63,480.01 h40
  text "DIR" at 164.97,380.01 h40
  text "A1" at 1326.47,380 h40
  text "SRAL" at 420.94,376.01 h40
  text "STEP" at 211.62,280 h40
  text "A2" at 1326.47,280 h40
  text "SDO" at 171.63,180.01 h40
  text "B1" at 1326.47,180 h40
  text "'.BoardName'_V'.BoardVersion'" at 1149.24,100.7 h35
  text "SDI" at 158.3,80.01 h40
  text "B2" at 1326.47,80 h40
  text "IC name: '.Chip'" at 1154,31.64 h50
  text "Supply range: VS = '.VS'" at 1154.1,-7.42 h50
  text "SCK" at 171.63,-19.99 h40
  text "GND" at 1326.47,-19.99 h40
  text "Max. current: IRMS = '.IRMS'" at 1154,-50.36 h50
  text "CSN" at 171.63,-119.99 h40
  text "GND" at 1326.47,-119.99 h40
  text "DRV_ENN" at 320,-200 h40 r25
  text "GND" at 171.63,-220 h40
  text "GND" at 1326.47,-219.99 h40
  text "GND" at 1326.47,-319.99 h40
  text "SRBL" at 420.94,-321.99 h40
  text "CLK16" at 244.94,-419.99 h40
  text "GND" at 1326.47,-419.99 h40
  text "SG_TST" at 291.59,-519.99 h40
  text "GND" at 1326.47,-519.99 h40
TopAsm:
  text ".BoardName" at 850,296 h50 r270
  text ".BoardVersion" at 99,-347.36 h50 r270

## Dimensions
-50,610.63 to 1450,610.63 on Dimension
1410.63,-550 to 1410.63,650 on Dimension